# EAGLE board pcb (EAGLE 9.7.0)
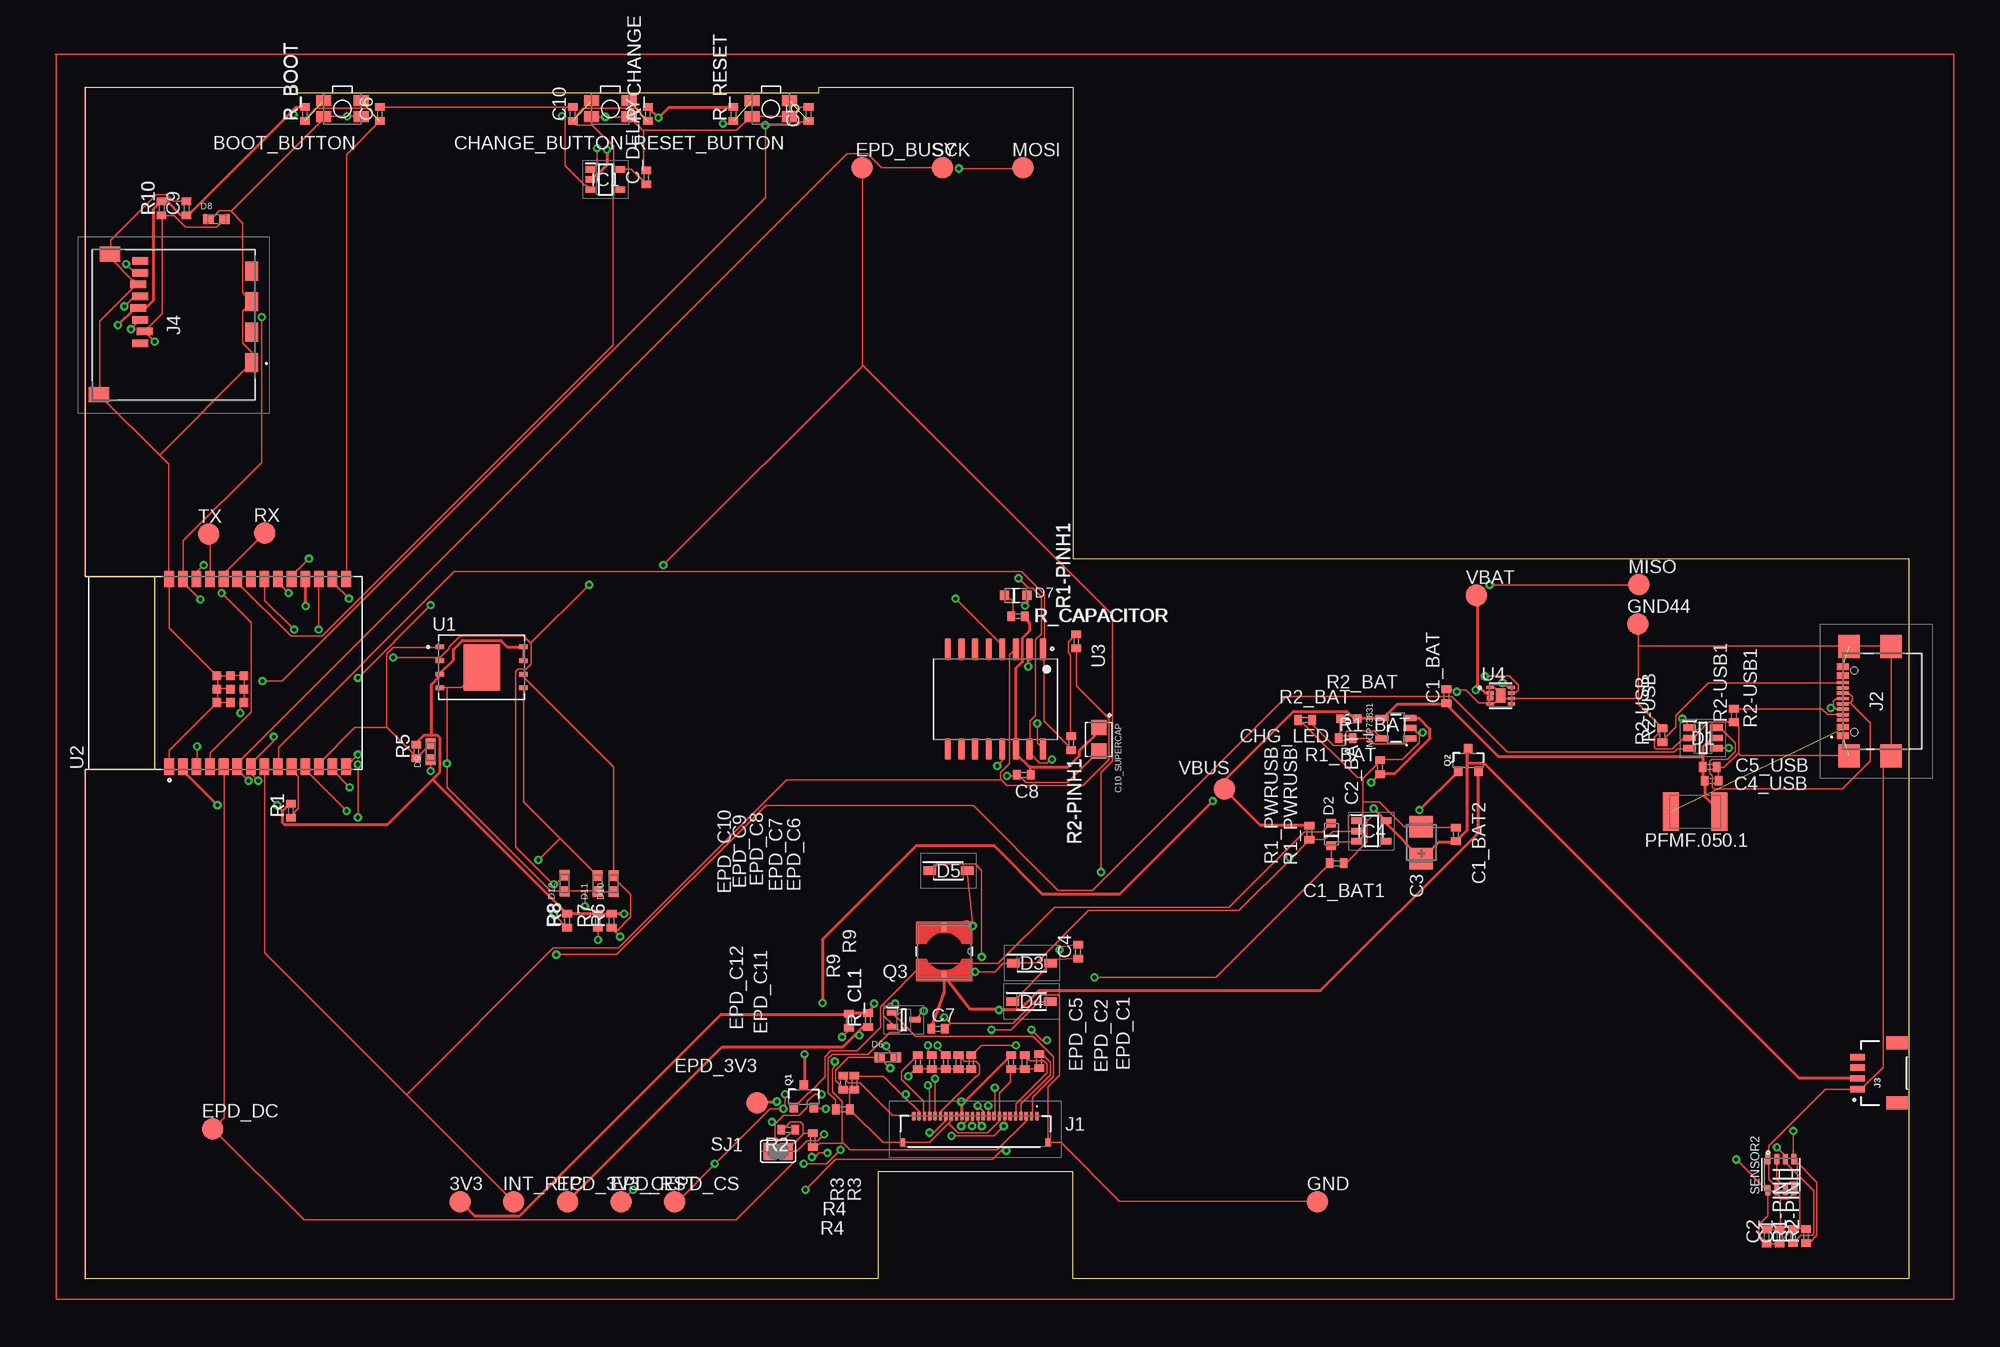
[diagram p0: board, top side]
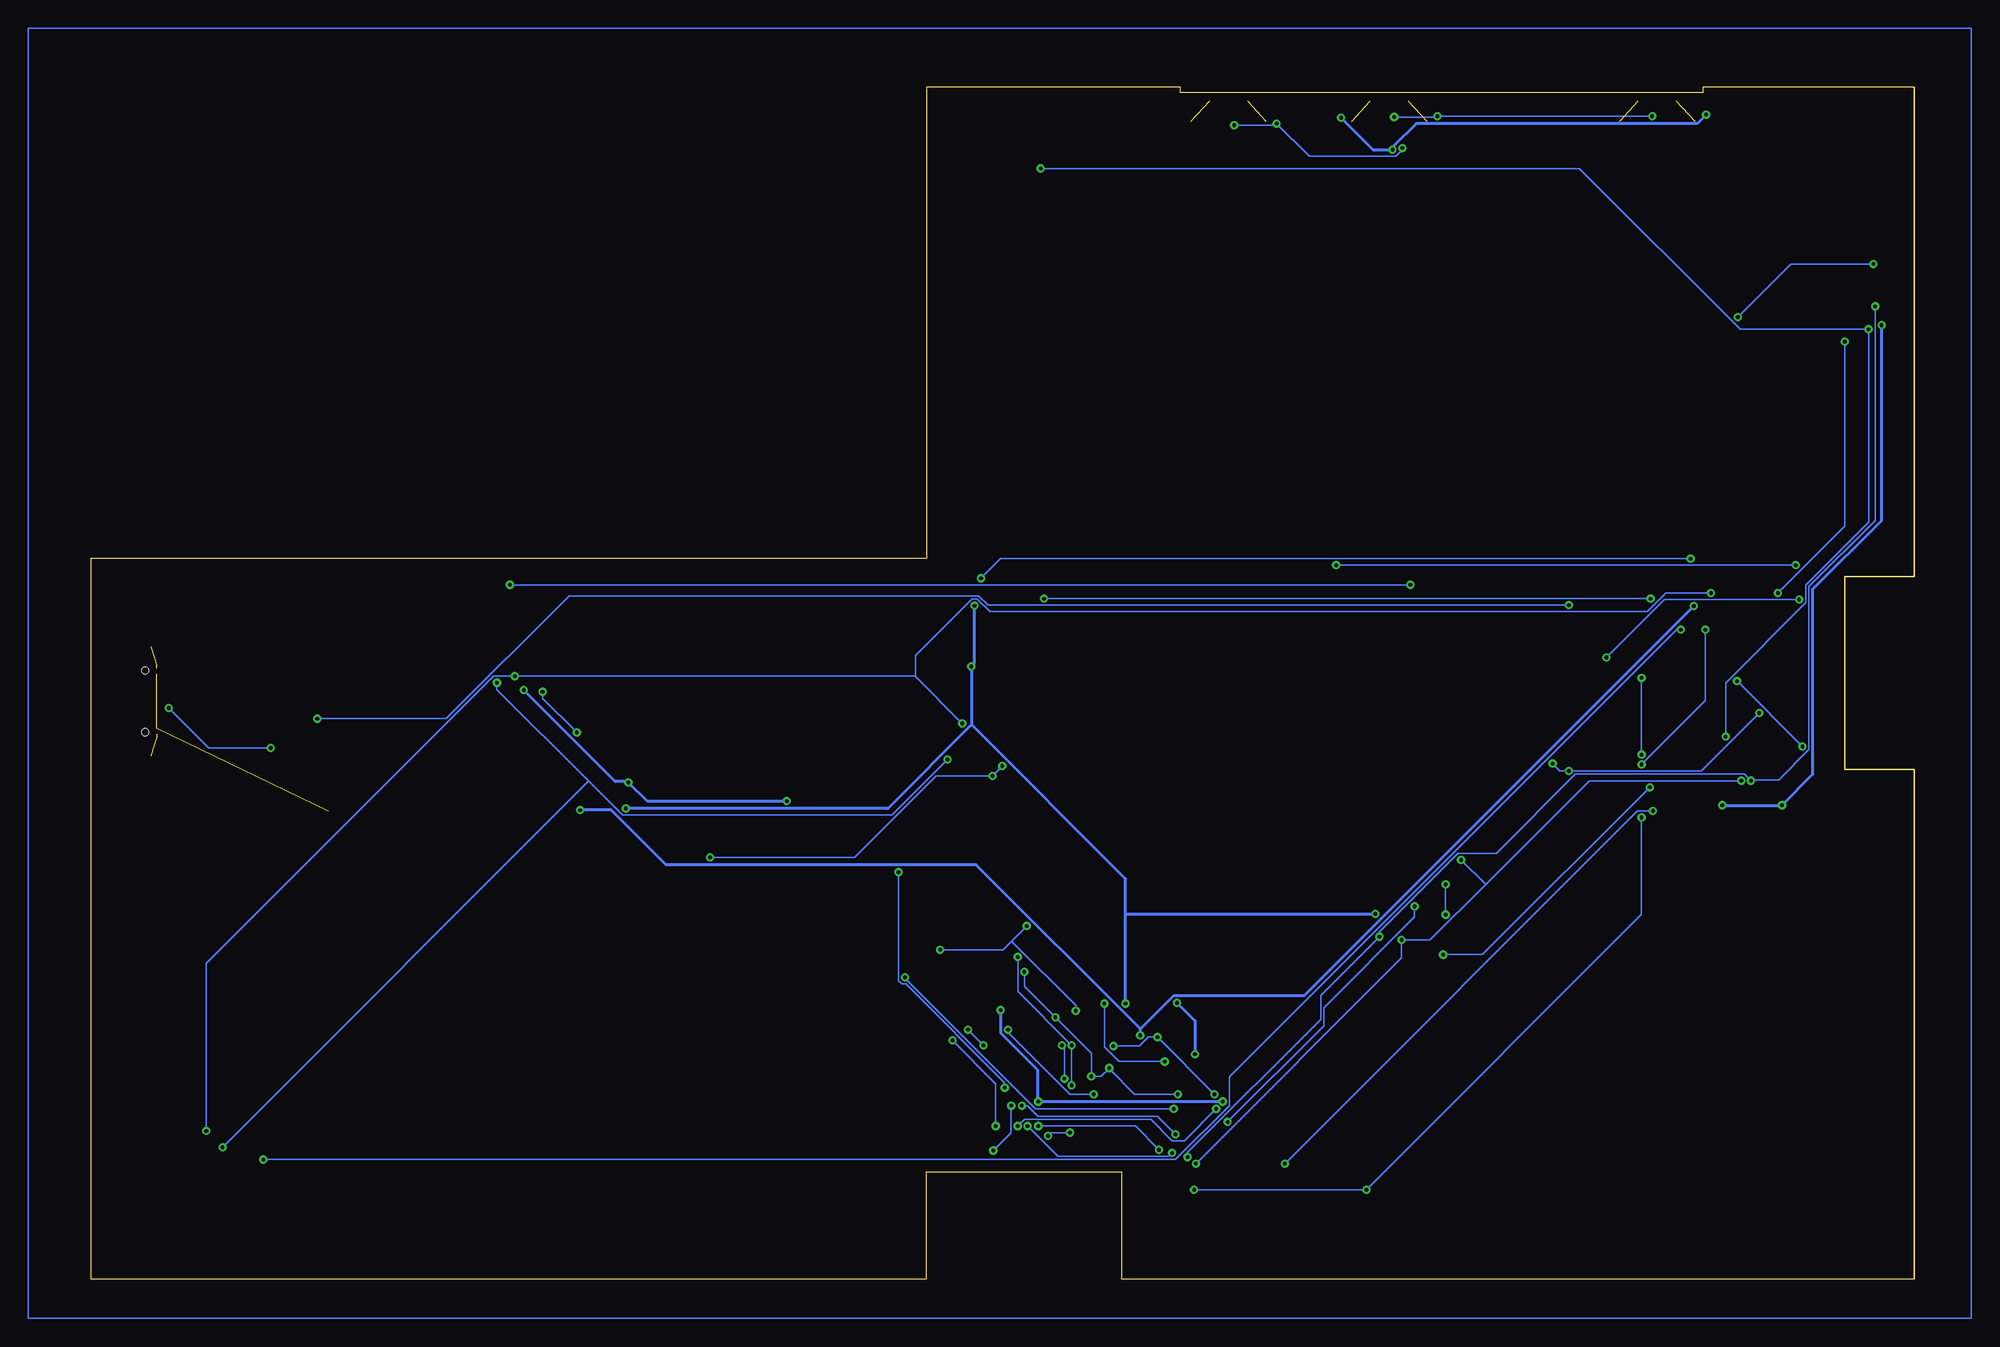
[diagram p1: board, bottom side, seen from below]

Size 170.2 x 111.2 mm. Coordinates in mm from the lower left corner, seen from the top.
Outline: 0,111.2 19.75,111.2 19.75,110.7 68.5,110.7 68.5,111.2 92.2,111.2 92.2,67.2 170.2,67.2 170.2,0 92.2,0 92.2,10 74,10 74,0 0,0 0,47.55 6.5,47.55 6.5,65.55 0,65.55 0,111.2
Copper layers (1*16): Top 0.035mm / dielectric 1.5mm / Bottom 0.035mm
Design rules "Fusion Electronics Design Rules *": minimum track width 6mil, minimum drill 0.35mm, track to track 6mil, track to pad 6mil, pad to pad 6mil, via to via 6mil, smd to smd 6mil, copper to edge 40mil, drill to drill 6mil, minimum pad ring 10mil, minimum via ring 8mil, stop-mask expansion 4mil, vias tented up to drill 0mil, thermal gap 10mil
Net classes: 1 power nets: width 0.3 mm; 2 natural nets: width 0.15 mm

## Footprints (pad centres in the part's own frame; a part is rotated, then mirrored left to right if it is on the bottom)
TP20R = smd 2 x 2: TP 0,0
MYBUTTON = smd 1.4 x 1.05: 1 1.75,0.75; 2 -1.75,0.75; 3 -1.75,-0.75; 4 1.75,-0.75
ESP32_WROVER_EAGLE-LTSPICE_C0402 = smd 0.7 x 0.9: 1 -0.65,0; 2 0.65,0
RCL_CT3528 = smd 2 x 2.2: + -1.5,0; - 1.5,0
CAPCP3225X100N = smd 1.4 x 1.4: 1 -1.1,0; 2 1.1,0
ADAFRUIT_CHIP-LED0603 = smd 0.8 x 0.8: A 0,-0.75; C 0,0.75
SOT95P280X145-6N = smd 1.2 x 0.6: 1 -1.25,0.95; 2 -1.25,0; 3 -1.25,-0.95; 4 1.25,-0.95; 5 1.25,0; 6 1.25,0.95
ESP32_WROVER_AVX---SD0805S020S1R0_AVX_SD0805S020S1R0_0 = smd 0.8 x 0.9: 1 -1.05,0; 2 1.05,0
SOD3716X135N = smd 1.15 x 0.8: 1 -1.75,0; 2 1.75,0
DIOC1608X36N = smd 0.97 x 0.94: 1 -0.75,0; 2 0.75,0
SOT95P280X125-5N = smd 0.9 x 0.6: 1 -1.4,0.95; 2 -1.4,0; 3 -1.4,-0.95; 4 1.4,-0.95; 5 1.4,0.95
SOT95P280X120-5N = smd 0.9 x 0.6: 1 -1.4,0.95; 2 -1.4,0; 3 -1.4,-0.95; 4 1.4,-0.95; 5 1.4,0.95
FH34SRJ24S05SH99 = smd 0.3 x 0.8: 1 5.75,1.45; 2 5.25,1.45; 3 4.75,1.45; 4 4.25,1.45; 5 3.75,1.45; 6 3.25,1.45; 7 2.75,1.45; 8 2.25,1.45; 9 1.75,1.45; 10 1.25,1.45; 11 0.75,1.45; 12 0.25,1.45; 13 -0.25,1.45; 14 -0.75,1.45; 15 -1.25,1.45; 16 -1.75,1.45; 17 -2.25,1.45; 18 -2.75,1.45; 19 -3.25,1.45; 20 -3.75,1.45; 21 -4.25,1.45; 22 -4.75,1.45; 23 -5.25,1.45; 24 -5.75,1.45 | smd 0.4 x 0.8: MP1 6.75,-1.05; MP2 -6.75,-1.05
SAMACSYS_PARTS_USB4110GFA = smd 0.3 x 1.15: A1 -3.35,3.678; A4 -2.55,3.678; A5 -1.25,3.678; A6 -0.25,3.678; A7 0.25,3.678; A8 1.25,3.678; A9 2.55,3.678; A12 3.35,3.678; B1 3.05,3.678; B4 2.25,3.678; B5 1.75,3.678; B6 0.75,3.678; B7 -0.75,3.678; B8 -1.75,3.678; B9 -2.25,3.678; B12 -3.05,3.678 | smd 2.18 x 2: MP1 -5.11,-0.827; MP2 5.11,-0.827; MP3 -5.11,3.103; MP4 5.11,3.103 | hole 0.65: -2.89,2.603; 2.89,2.603
JST04_1MM_RA = smd 0.6 x 1.35: 1 -1.5,0; 2 -0.5,0; 3 0.5,0; 4 1.5,0 | smd 1.2 x 2: NC1 2.8,-3.675; NC2 -2.8,-3.675
112ATAARR03ATTEND = smd 1.8 x 1.2: G1 10.6,10.4; G2 4.9,10.4; S1 7.75,10.4; S2 2.05,10.4 | smd 1.4 x 1.9: G3 13.6,-3.85; G4 0.45,-2.85 | smd 0.7 x 1.5: P1 8.8,0; P2 7.7,0.4; P3 6.6,0; P4 5.5,-0.2; P5 4.4,0; P6 3.3,-0.2; P7 2.2,0; P8 1.1,0
IND_4828-WE-TPC_WRE = smd 0.813 x 0.406: 1 -2.286,0; 2 2.286,0
ESP32_WROVER_SPARKFUN-IC-POWER_SOT23-5 = smd 0.55 x 1.2: 1 -0.95,-1.3; 2 0,-1.3; 3 0.95,-1.3; 4 0.95,1.3; 5 -0.95,1.3
ESP32C6_VARISTOR_CT/CN1812 = smd 1.5 x 3.6: 1 -2.25,0; 2 2.25,0
ESP32_WROVER_SPARKFUN-DISCRETESEMI_SOT23-3 = smd 0.8 x 0.9: 1 -0.95,-1; 2 0.95,-1; 3 0,1.1
SOT65P210X110-3N = smd 1.05 x 0.5: 1 -1.05,0.65; 2 -1.05,-0.65; 3 1.05,0
ESP32_WROVER_EAGLE-LTSPICE_R0402 = smd 0.7 x 0.9: 1 -0.65,0; 2 0.65,0
ESP32_WROVER_BME680_PSON80P300X300X100-8N = smd 1.016 x 0.5: 1 1.458,1.2; 2 1.458,0.4; 3 1.458,-0.4; 4 1.458,-1.2; 5 -1.458,-1.22; 6 -1.458,-0.4; 7 -1.458,0.4; 8 -1.458,1.2
SJ = smd 1.168 x 1.6: 1 -0.762,0; 2 0.762,0
SON127P600X800X80-9N = smd 0.94 x 0.44: 1 -3.895,1.905; 2 -3.895,0.635; 3 -3.895,-0.635; 4 -3.895,-1.905; 5 3.895,-1.905; 6 3.895,-0.635; 7 3.895,0.635; 8 3.895,1.905 | smd 3.4 x 4.3: 9 0,0
XCVR_ESP32-C6-WROOM-1-N8 = smd 1.5 x 0.9: 1 -8.75,5.26; 2 -8.75,3.99; 3 -8.75,2.72; 4 -8.75,1.45; 5 -8.75,0.18; 6 -8.75,-1.09; 7 -8.75,-2.36; 8 -8.75,-3.63; 9 -8.75,-4.9; 10 -8.75,-6.17; 11 -8.75,-7.44; 12 -8.75,-8.71; 13 -8.75,-9.98; 14 -8.75,-11.25; 15 8.75,-11.25; 16 8.75,-9.98; 17 8.75,-8.71; 18 8.75,-7.44; 19 8.75,-6.17; 20 8.75,-4.9; 21 8.75,-3.63; 22 8.75,-2.36; 23 8.75,-1.09; 24 8.75,0.18; 25 8.75,1.45; 26 8.75,2.72; 27 8.75,3.99; 28 8.75,5.26 | smd 0.8 x 0.8: 29_1 -2.755,0.79; 29_2 -1.505,0.79; 29_3 -0.255,0.79; 29_4 -2.755,-0.46; 29_5 -1.505,-0.46; 29_6 -0.255,-0.46; 29_7 -2.755,-1.71; 29_8 -1.505,-1.71; 29_9 -0.255,-1.71
SOIC127P1032X265-16N = smd 2.05 x 0.59: 1 -4.655,4.445; 2 -4.655,3.175; 3 -4.655,1.905; 4 -4.655,0.635; 5 -4.655,-0.635; 6 -4.655,-1.905; 7 -4.655,-3.175; 8 -4.655,-4.445; 9 4.655,-4.445; 10 4.655,-3.175; 11 4.655,-1.905; 12 4.655,-0.635; 13 4.655,0.635; 14 4.655,1.905; 15 4.655,3.175; 16 4.655,4.445
SON50P200X200X80-9N = smd 0.76 x 0.27: 1 -0.985,0.75; 4 -0.985,-0.75; 5 0.985,-0.75; 6 0.985,-0.25; 7 0.985,0.25; 8 0.985,0.75 | smd 0.762 x 0.406: 2 -0.985,0.25 | smd 0.711 x 0.406: 3 -0.985,-0.25 | smd 0.9 x 1.3: 9 0,0

## Placement (x,y rotation side)
3V3  TPTP20R  [TP20R]  35,7.2 0 top
BOOT_BUTTON  BUTTON_CUSYOMV1  [MYBUTTON]  24,109.2 180 top
C1  100nF  [ESP32_WROVER_EAGLE-LTSPICE_C0402]  158.14,3.93 90 top
C1_BAT  4.7uF  [ESP32_WROVER_EAGLE-LTSPICE_C0402]  127.03,54.35 90 top
C1_BAT1  4.7uF  [ESP32_WROVER_EAGLE-LTSPICE_C0402]  116.78,38.77 0 top
C1_BAT2  4.7uF  [ESP32_WROVER_EAGLE-LTSPICE_C0402]  127.92,41.47 90 top
C2  100nF  [ESP32_WROVER_EAGLE-LTSPICE_C0402]  156.92,3.93 90 top
C2_BAT  4.7uF  [ESP32_WROVER_EAGLE-LTSPICE_C0402]  120.84,47.75 90 top
C3  100uF  [RCL_CT3528]  124.69,40.7 90 top
C4  4.7uF/25V  [ESP32_WROVER_EAGLE-LTSPICE_C0402]  92.66,30.54 90 top
C4_USB  100nF  [ESP32_WROVER_EAGLE-LTSPICE_C0402]  151.8,46.47 0 top
C5  1uF  [ESP32_WROVER_EAGLE-LTSPICE_C0402]  67.5,108.7 90 top
C5_USB  4.7uF  [ESP32_WROVER_EAGLE-LTSPICE_C0402]  151.61,47.77 0 top
C6  100nF  [ESP32_WROVER_EAGLE-LTSPICE_C0402]  27.5,108.7 90 top
C7  10uF  [ESP32_WROVER_EAGLE-LTSPICE_C0402]  79.59,23.33 0 top
C8  100nF  [ESP32_WROVER_EAGLE-LTSPICE_C0402]  87.58,47.03 0 top
C9  100nF  [ESP32_WROVER_EAGLE-LTSPICE_C0402]  9.46,99.9 90 top
C10  100nF  [ESP32_WROVER_EAGLE-LTSPICE_C0402]  45.5,108.7 90 top
C10_SUPERCAP  CPH3225A  [CAPCP3225X100N]  94.59,50.34 270 top
C_DELAY  100nF  [ESP32_WROVER_EAGLE-LTSPICE_C0402]  52.37,102.79 90 top
CHANGE_BUTTON  BUTTON_CUSYOMV1  [MYBUTTON]  49,109.2 180 top
CHG_LED  [ADAFRUIT_CHIP-LED0603]  117.94,52.25 90 top
D1  USBLC6-2SC6Y  [SOT95P280X145-6N]  150.98,50.47 0 top
D2  ESP32_WROVER_AVX---SD0805S020S1R0_AVX_SD0805S020S1R0_0_0AVX_SD0805S020S1R0_0_0  [ESP32_WROVER_AVX---SD0805S020S1R0_AVX_SD0805S020S1R0_0]  116.29,41.48 90 top
D3  MBR0530  [SOD3716X135N]  88.36,29.47 0 top
D4  MBR0530  [SOD3716X135N]  88.32,25.88 0 top
D5  MBR0530  [SOD3716X135N]  80.56,38.08 0 top
D6  PGB1010603MR  [DIOC1608X36N]  74.88,20.67 0 top
D7  ESP32_WROVER_AVX---SD0805S020S1R0_AVX_SD0805S020S1R0_0_0AVX_SD0805S020S1R0_0_0  [ESP32_WROVER_AVX---SD0805S020S1R0_AVX_SD0805S020S1R0_0]  86.84,63.78 0 top
D8  PGB1010603MR  [DIOC1608X36N]  12.26,98.9 0 top
D9  PGB1010603MR  [DIOC1608X36N]  32.24,49.2 90 top
D10  PGB1010603MR  [DIOC1608X36N]  49.32,36.87 90 top
D11  PGB1010603MR  [DIOC1608X36N]  47.8,36.87 90 top
D12  PGB1010603MR  [DIOC1608X36N]  44.74,36.9 90 top
EPD_3V3  TPTP20R  [TP20R]  62.68,16.41 0 top
EPD_3V3_C  TPTP20R  [TP20R]  45,7.2 0 top
EPD_BUSY  TPTP20R  [TP20R]  72.5,103.7 0 top
EPD_C1  1uF/50V  [ESP32_WROVER_EAGLE-LTSPICE_C0402]  89.02,20.3 90 top
EPD_C2  1uF/50V  [ESP32_WROVER_EAGLE-LTSPICE_C0402]  87.67,20.2 90 top
EPD_C5  0.1uF/50V  [ESP32_WROVER_EAGLE-LTSPICE_C0402]  86.41,20.2 90 top
EPD_C6  1uF/50V  [ESP32_WROVER_EAGLE-LTSPICE_C0402]  82.69,20.2 90 top
EPD_C7  1uF/50V  [ESP32_WROVER_EAGLE-LTSPICE_C0402]  81.5,20.2 90 top
EPD_C8  1uF/50V  [ESP32_WROVER_EAGLE-LTSPICE_C0402]  80.31,20.2 90 top
EPD_C9  1uF/50V  [ESP32_WROVER_EAGLE-LTSPICE_C0402]  79.02,20.2 90 top
EPD_C10  1uF/50V  [ESP32_WROVER_EAGLE-LTSPICE_C0402]  77.71,20.2 90 top
EPD_C11  1uF/50V  [ESP32_WROVER_EAGLE-LTSPICE_C0402]  71.79,18.29 90 top
EPD_C12  1uF/50V  [ESP32_WROVER_EAGLE-LTSPICE_C0402]  70.74,18.29 90 top
EPD_CS  TPTP20R  [TP20R]  55,7.2 0 top
EPD_DC  TPTP20R  [TP20R]  11.89,13.99 0 top
EPD_RST  TPTP20R  [TP20R]  50,7.2 0 top
GND  TPTP20R  [TP20R]  115,7.2 0 top
GND44  TPTP20R  [TP20R]  144.89,61.09 0 top
IC1  BD5229G-TR  [SOT95P280X125-5N]  48.55,102.6 0 top
IC4  XC6220A331MR-G  [SOT95P280X120-5N]  120.03,41.79 0 top
INT_RTC  TPTP20R  [TP20R]  40,7.2 0 top
J1  FH34SRJ-24S-0.5SH_99_  [FH34SRJ24S05SH99]  83.07,13.74 0 top
J2  SAMACSYS_PARTS_USB4110-GF-A  [SAMACSYS_PARTS_USB4110GFA]  167.7,53.9 90 top
J3  QWIIC_RIGHT_ANGLE  [JST04_1MM_RA]  165.4,19.2 90 top
J4  112A-TAAR-R03_ATTEND  [112ATAARR03ATTEND]  5.15,96.1 270 top
L1  68uH  [IND_4828-WE-TPC_WRE]  80.17,30.55 270 top
MCP73831  ESP32_WROVER_SPARKFUN-IC-POWER_MCP73831  [ESP32_WROVER_SPARKFUN-IC-POWER_SOT23-5]  122.32,51.39 90 top
MISO  TPTP20R  [TP20R]  145.01,64.79 0 top
MOSI  TPTP20R  [TP20R]  87.5,103.7 0 top
PFMF.050.1  ESP32C6_VARISTORCN1812  [ESP32C6_VARISTOR_CT/CN1812]  150.24,43.6 0 top
Q1  20V/4.2A/52mΩ/1.4W  [ESP32_WROVER_SPARKFUN-DISCRETESEMI_SOT23-3]  67.06,16.96 0 top
Q2  20V/4.2A/52mΩ/1.4W  [ESP32_WROVER_SPARKFUN-DISCRETESEMI_SOT23-3]  129.08,48.36 0 top
Q3  SI1308EDL-T1-GE3  [SOT65P210X110-3N]  76.39,24.18 0 top
R1  10K  [ESP32_WROVER_EAGLE-LTSPICE_R0402]  19.2,43.7 90 top
R1-PINH  10K  [ESP32_WROVER_EAGLE-LTSPICE_R0402]  159.38,3.97 90 top
R1-PINH1  10K  [ESP32_WROVER_EAGLE-LTSPICE_R0402]  92.49,59.49 90 top
R1_BAT  200  [ESP32_WROVER_EAGLE-LTSPICE_R0402]  117.65,50.45 0 top
R1_PWRUSB  100k  [ESP32_WROVER_EAGLE-LTSPICE_R0402]  114.25,41.64 90 top
R2  2.2  [ESP32_WROVER_EAGLE-LTSPICE_R0402]  65.63,13.91 180 top
R2-PINH  10K  [ESP32_WROVER_EAGLE-LTSPICE_R0402]  160.59,3.97 90 top
R2-PINH1  10K  [ESP32_WROVER_EAGLE-LTSPICE_R0402]  92.03,49.99 90 top
R2-USB  5k1  [ESP32_WROVER_EAGLE-LTSPICE_R0402]  147.18,50.73 90 top
R2-USB1  5k1  [ESP32_WROVER_EAGLE-LTSPICE_R0402]  153.86,52.57 90 top
R2_BAT  2K  [ESP32_WROVER_EAGLE-LTSPICE_R0402]  113.86,52.15 0 top
R3  0.47  [ESP32_WROVER_EAGLE-LTSPICE_R0402]  67.91,12.93 270 top
R4  10K  [ESP32_WROVER_EAGLE-LTSPICE_R0402]  70.69,15.81 180 top
R5  10K  [ESP32_WROVER_EAGLE-LTSPICE_R0402]  30.91,49.21 90 top
R6  10K  [ESP32_WROVER_EAGLE-LTSPICE_R0402]  49.13,33.41 90 top
R7  10K  [ESP32_WROVER_EAGLE-LTSPICE_R0402]  47.85,33.41 90 top
R8  10K  [ESP32_WROVER_EAGLE-LTSPICE_R0402]  44.97,33.41 90 top
R9  10K  [ESP32_WROVER_EAGLE-LTSPICE_R0402]  71.29,24.11 90 top
R10  10K  [ESP32_WROVER_EAGLE-LTSPICE_R0402]  7.13,99.9 90 top
R_BOOT  10K  [ESP32_WROVER_EAGLE-LTSPICE_R0402]  20.5,108.7 90 top
R_CAPACITOR  15  [ESP32_WROVER_EAGLE-LTSPICE_R0402]  87.05,61.84 0 top
R_CHANGE  10K  [ESP32_WROVER_EAGLE-LTSPICE_R0402]  52.5,108.7 90 top
R_CL1  10K  [ESP32_WROVER_EAGLE-LTSPICE_R0402]  73.06,24.13 90 top
R_RESET  10K  [ESP32_WROVER_EAGLE-LTSPICE_R0402]  60.5,108.7 90 top
RESET_BUTTON  BUTTON_CUSYOMV1  [MYBUTTON]  64,109.2 180 top
RX  TPTP20R  [TP20R]  16.73,69.59 0 top
SCK  TPTP20R  [TP20R]  80,103.7 0 top
SENSOR2  ESP32_WROVER_BME680_BME680  [ESP32_WROVER_BME680_PSON80P300X300X100-8N]  158.25,9.72 90 top
SJ1  [SJ]  64.66,11.89 0 top
TX  TPTP20R  [TP20R]  11.51,69.49 0 top
U1  W25Q512JVEIQ  [SON127P600X800X80-9N]  37,57.06 0 top
U2  ESP32-C6-WROOM-1-N8  [XCVR_ESP32-C6-WROOM-1-N8]  13.1,56.54 90 top
U3  DS3231SN#  [SOIC127P1032X265-16N]  84.95,54.1 270 top
U4  MAX17048G+T10  [SON50P200X200X80-9N]  132.11,54.42 0 top
VBAT  TPTP20R  [TP20R]  129.85,63.79 0 top
VBUS  TPTP20R  [TP20R]  106.33,45.71 0 top

## Library data of the parts
3V3 BOOT_BUTTON CHANGE_BUTTON CHG_LED EPD_3V3 EPD_3V3_C EPD_BUSY EPD_CS EPD_DC EPD_RST GND GND44 INT_RTC MISO MOSI PFMF.050.1 RESET_BUTTON RX SCK SJ1 TX VBAT VBUS = DeskAssistant v19 v1
C1 C1_BAT C1_BAT1 C1_BAT2 C2 C2_BAT C4 C4_USB C5 C5_USB C6-C10 C_DELAY EPD_C1 EPD_C2 EPD_C5-EPD_C12 = DeskAssistant v19 v1; SPICEMODEL: NONE; SPICEPREFIX: C
C3 = DeskAssistant v19 v1; SPICEPREFIX: C
C10_SUPERCAP = DeskAssistant v19 v1; AVAILABILITY: Not in stock; CHECK_PRICES: https://www.snapeda.com/parts/CPH3225A/Seiko+Instruments/view-part/?ref=eda; DESCRIPTION: 11 mF (EDLC) Supercapacitor 3.3 V 1210 (3225 Metric) - -; MF: Seiko Instruments; MP: CPH3225A; PACKAGE: 1210 Seiko; PRICE: None; PURCHASE-URL: https://www.snapeda.com/api/url_track_click_mouser/?unipart_id=562593&manufacturer=Seiko Instruments&part_name=CPH3225A&search_term=None; SNAPEDA_LINK: https://www.snapeda.com/parts/CPH3225A/Seiko+Instruments/view-part/?ref=snap
D1 = DeskAssistant v19 v1; AVAILABILITY: In Stock; CHECK_PRICES: https://www.snapeda.com/parts/USBLC6-2SC6Y/STMicroelectronics/view-part/?ref=eda; DESCRIPTION: 17V Clamp 5A (8/20µs) Ipp Tvs Diode Surface Mount SOT-23-6; MF: STMicroelectronics; MP: USBLC6-2SC6Y; PACKAGE: SOT-23-6 STMicroelectronics; PRICE: None; SNAPEDA_LINK: https://www.snapeda.com/parts/USBLC6-2SC6Y/STMicroelectronics/view-part/?ref=snap
D2 D7 = DeskAssistant v19 v1; CENTROID_NOT_SPECIFIED: No; DATASHEET: http://datasheets.avx.com/schottky.pdf; DIGIKEY_DESCRIPTION: DIODE SCHOTTKY 20V 1A 0805; DIGIKEY_PART_NUMBER: 478-7800-1-ND; LEAD_FREE: yes; MF: AVX; MOUSER_PART_NUMBER: 581-SD0805S020S1R0; PACKAGE: 0805 (2012 metric); PREFIX: D; ROHS: yes; TEMPERATURE_RANGE_HIGH: +125°C; TEMPERATURE_RANGE_LOW: -55°C
D3-D5 = DeskAssistant v19 v1; AVAILABILITY: In Stock; CHECK_PRICES: https://www.snapeda.com/parts/MBR0530/Onsemi/view-part/?ref=eda; DESCRIPTION: Diode Schottky 30 V 500mA Surface Mount SOD-123; MF: ON Semiconductor; MP: MBR0530; PACKAGE: SOD-123-2 ON Semiconductor; PRICE: None; PURCHASE-URL: https://www.snapeda.com/api/url_track_click_mouser/?unipart_id=179458&manufacturer=ON Semiconductor&part_name=MBR0530&search_term=None; SNAPEDA_LINK: https://www.snapeda.com/parts/MBR0530/Onsemi/view-part/?ref=snap
D6 D8-D12 = DeskAssistant v19 v1; AVAILABILITY: In Stock; CHECK_PRICES: https://www.snapeda.com/parts/PGB1010603MR/Littelfuse/view-part/?ref=eda; DESCRIPTION: 150V (Typ) Clamp - Ipp Tvs Diode Surface Mount 0603 (1608 Metric); MF: Littelfuse Inc.; MP: PGB1010603MR; PACKAGE: 0603 Littelfuse Inc.; PRICE: None; PURCHASE-URL: https://www.snapeda.com/api/url_track_click_mouser/?unipart_id=5659453&manufacturer=Littelfuse Inc.&part_name=PGB1010603MR&search_term=None; SNAPEDA_LINK: https://www.snapeda.com/parts/PGB1010603MR/Littelfuse/view-part/?ref=snap
IC1 = DeskAssistant v19 v1; DESCRIPTION: Voltage Detector with Adjustable Delay Time: CMOS processes are utilized to develop high precision, low current consumption CMOS reset ICs that allow arbitrary setting of the delay time. The extensive lineup includes both Nch Open Drain and CMOS output types in a wide range of detection voltages (from 2.3V to 6.0V, in 0.1V steps), enabling selection of the ideal solution based on customer requirements. In addition, the entire series is of course both lead-free and RoHS-compliant.; HEIGHT: 1.25mm; MANUFACTURER_NAME: ROHM Semiconductor; MANUFACTURER_PART_NUMBER: BD5229G-TR; MOUSER_PART_NUMBER: 755-BD5229G-TR; MOUSER_PRICE-STOCK: https://www.mouser.co.uk/ProductDetail/ROHM-Semiconductor/BD5229G-TR?qs=4kLU8WoGk0vvnhrrYwdszw%3D%3D
IC4 = DeskAssistant v19 v1; DESCRIPTION: LDO Voltage Regulators; HEIGHT: 1.2mm; MANUFACTURER_NAME: Torex; MANUFACTURER_PART_NUMBER: XC6220A331MR-G; MOUSER_PART_NUMBER: 865-XC6220A331MR-G; MOUSER_PRICE-STOCK: https://www.mouser.co.uk/ProductDetail/Torex-Semiconductor/XC6220A331MR-G?qs=AsjdqWjXhJ8ZSWznL1J0gg%3D%3D
J1 = DeskAssistant v19 v1; DESCRIPTION: 24 Position FFC, FPC Connector Contacts, Top and Bottom 0.020" (0.50mm) Surface Mount, Right Angle; HEIGHT: 1.1mm; MANUFACTURER_NAME: Hirose; MANUFACTURER_PART_NUMBER: FH34SRJ-24S-0.5SH(99); MOUSER_PART_NUMBER: 798-FH34SRJ24S05SH99; MOUSER_PRICE-STOCK: https://www.mouser.co.uk/ProductDetail/Hirose-Connector/FH34SRJ-24S-0.5SH99?qs=vcbW%252B4%252BSTIpKBl5ap9J8Fw%3D%3D
J2 = DeskAssistant v19 v1; DESCRIPTION: CONN USB 2.0 TYPE-C R/A SMT; HEIGHT: 3.26mm; MANUFACTURER_NAME: GCT (GLOBAL CONNECTOR TECHNOLOGY); MANUFACTURER_PART_NUMBER: USB4110-GF-A; MOUSER_PART_NUMBER: 640-USB4110-GF-A; MOUSER_PRICE-STOCK: https://www.mouser.co.uk/ProductDetail/GCT/USB4110-GF-A?qs=KUoIvG%2F9IlYiZvIXQjyJeA%3D%3D
J3 = DeskAssistant v19 v1; PROD_ID: CONN-13694
J4 = DeskAssistant v19 v1; DESCRIPTION: Micro SD Card Socket, Push-Push Type, Top Mount, SMT, H=1.83mm, 10u; HEIGHT: 1.9mm; MANUFACTURER_NAME: ATTEND; MANUFACTURER_PART_NUMBER: 112A-TAAR-R03 ATTEND
L1 = DeskAssistant v19 v1; COPYRIGHT: Copyright (C) 2024 Ultra Librarian. All rights reserved.; MANUFACTURER_PART_NUMBER: 744043680; MFR_NAME: Wurth Electronics
MCP73831 = DeskAssistant v19 v1; PROD_ID: IC-09995
Q1 Q2 = DeskAssistant v19 v1; PROD_ID: TRAN-14388
Q3 = DeskAssistant v19 v1; AVAILABILITY: In Stock; CHECK_PRICES: https://www.snapeda.com/parts/SI1308EDL-T1-GE3/Vishay+Siliconix/view-part/?ref=eda; DESCRIPTION: Si1308EDL-T1-GE3 N-channel MOSFET Transistor, 1.5 A, 30 V, 3-Pin SC-70 | Siliconix / Vishay SI1308EDL-T1-GE3; MF: Vishay Siliconix; MP: SI1308EDL-T1-GE3; PACKAGE: SOT-323 Vishay Semiconductor; PRICE: None; PURCHASE-URL: https://www.snapeda.com/api/url_track_click_mouser/?unipart_id=274603&manufacturer=Vishay Siliconix&part_name=SI1308EDL-T1-GE3&search_term=None; SNAPEDA_LINK: https://www.snapeda.com/parts/SI1308EDL-T1-GE3/Vishay+Siliconix/view-part/?ref=snap
R1 R1-PINH R1-PINH1 R1_BAT R1_PWRUSB R2 R2-PINH R2-PINH1 R2-USB R2-USB1 R2_BAT R3-R10 R_BOOT R_CAPACITOR R_CHANGE R_CL1 R_RESET = DeskAssistant v19 v1; SPICEMODEL: NONE; SPICEPREFIX: R
SENSOR2 = DeskAssistant v19 v1; AVAILABILITY: Unavailable; DESCRIPTION: Integrated Environmental Unit; MF: Bosch Sensortec; MP: BME680; PACKAGE: LGA-8 Bosch Tools; PRICE: None
U1 = DeskAssistant v19 v1; AVAILABILITY: In Stock; CHECK_PRICES: https://www.snapeda.com/parts/W25Q512JVEIQ/Winbond+Electronics/view-part/?ref=eda; DESCRIPTION: FLASH - NOR Memory IC 512Mb (64M x 8) SPI - Quad I/O 133 MHz 8-WSON (8x6); MF: Winbond Electronics; MP: W25Q512JVEIQ; PACKAGE: Package; PRICE: None; SNAPEDA_LINK: https://www.snapeda.com/parts/W25Q512JVEIQ/Winbond+Electronics/view-part/?ref=snap
U2 = DeskAssistant v19 v1; AVAILABILITY: In Stock; CHECK_PRICES: https://www.snapeda.com/parts/ESP32-C6-WROOM-1-N8/Espressif+Systems/view-part/?ref=eda; DESCRIPTION: Multiprotocol Modules ESP32-C6 module, Wi-Fi 6 in 2.4 GHz band, Bluetooth 5, Zigbee 3.0 and Thread. ESP34-WROOM Compatible - ENGINEERING SAMPLE; MF: Espressif Systems; MP: ESP32-C6-WROOM-1-N8; PACKAGE: None; PRICE: None; SNAPEDA_LINK: https://www.snapeda.com/parts/ESP32-C6-WROOM-1-N8/Espressif+Systems/view-part/?ref=snap
U3 = DeskAssistant v19 v1; AVAILABILITY: In Stock; CHECK_PRICES: https://www.snapeda.com/parts/DS3231SN%23/Analog+Devices/view-part/?ref=eda; DESCRIPTION: Extremely Accurate I²C-Integrated RTC/TCXO/Crystal; MF: Analog Devices; MP: DS3231SN#; PACKAGE: SOIC-16 Maxim; PRICE: None; PURCHASE-URL: https://www.snapeda.com/api/url_track_click_mouser/?unipart_id=99048&manufacturer=Analog Devices&part_name=DS3231SN#&search_term=None; SNAPEDA_LINK: https://www.snapeda.com/parts/DS3231SN%23/Analog+Devices/view-part/?ref=snap
U4 = DeskAssistant v19 v1; AVAILABILITY: In Stock; CHECK_PRICES: https://www.snapeda.com/parts/MAX17048G+T10/Analog+Devices/view-part/?ref=eda; DESCRIPTION: 3µA 1-Cell/2-Cell Fuel Gauge with ModelGauge; MF: Analog Devices; MP: MAX17048G+T10; PACKAGE: TDFN-8 Maxim; PRICE: None; PURCHASE-URL: https://www.snapeda.com/api/url_track_click_mouser/?unipart_id=329239&manufacturer=Analog Devices&part_name=MAX17048G+T10&search_term=None; SNAPEDA_LINK: https://www.snapeda.com/parts/MAX17048G+T10/Analog+Devices/view-part/?ref=snap

## Nets
3V3 [power nets]: 3V3.TP C1_BAT2.1 C3.+ C9.1 D7.2 IC1.2 IC4.5 J3.2 J4.P4 Q2.3 R1.2 R5.2 R6.2 R7.2 R8.2 R9.2 R10.2 R_BOOT.2 R_CHANGE.2 R_CL1.2 R_RESET.2 U1.3 U1.7 U1.8 U2.2 U3.2
32KHZ [natural nets]: R2-PINH1.1 U2.9 U3.1
DN [natural nets]: D1.4 J2.A7 J2.B7
DP [natural nets]: D1.6 J2.A6 J2.B6
EPD_3V3 [power nets]: C7.1 EPD_3V3.TP EPD_C5.2 J1.15 J1.16 L1.2 Q2.2
EPD_3V3_C [power nets]: EPD_3V3_C.TP Q2.1 R_CL1.1 U2.18
EPD_BUSY [natural nets]: EPD_BUSY.TP J1.9 U2.26
EPD_CS [natural nets]: D6.2 EPD_CS.TP J1.12 R9.1 U2.11
EPD_DC [natural nets]: EPD_DC.TP J1.11 U2.5
EPD_RST [natural nets]: EPD_RST.TP J1.10 U2.21
FLASH_CS [natural nets]: D9.2 R5.1 U1.1 U2.12
GDR [natural nets]: J1.2 Q3.1 R4.2
GND [natural nets]: BOOT_BUTTON.1 BOOT_BUTTON.2 C1.2 C1_BAT1.2 C1_BAT2.2 C1_BAT.2 C2.2 C2_BAT.2 C3.- C4_USB.2 C5.2 C5_USB.2 C6.2 C7.2 C8.1 C9.2 C10.2 C10_SUPERCAP.2 C_DELAY.2 CHANGE_BUTTON.1 CHANGE_BUTTON.2 D1.2 D3.1 D6.1 D8.1 D9.1 D10.1 D11.1 D12.1 EPD_C1.1 EPD_C2.1 EPD_C5.1 EPD_C6.1 EPD_C7.1 EPD_C8.1 EPD_C9.1 EPD_C10.1 EPD_C11.1 EPD_C12.1 GND44.TP GND.TP IC1.3 IC4.2 J1.8 J1.17 J1.MP1 J1.MP2 J2.A1 J2.A12 J2.B1 J2.B12 J2.MP1 J2.MP2 J2.MP3 J2.MP4 J3.1 J4.G1 J4.G2 J4.G3 J4.G4 J4.P6 MCP73831.2 R1_PWRUSB.1 R2-USB1.1 R2-USB.2 R2.1 R2_BAT.1 R4.1 RESET_BUTTON.1 RESET_BUTTON.2 SENSOR2.1 SENSOR2.5 SENSOR2.7 SJ1.1 U1.4 U1.9 U2.1 U2.28 U2.29_1 U2.29_2 U2.29_3 U2.29_4 U2.29_5 U2.29_6 U2.29_7 U2.29_8 U2.29_9 U3.13 U4.1 U4.4 U4.6 U4.9
I2C_PW [natural nets]: C1.1 C2.1 R1-PINH.2 R2-PINH.2 SENSOR2.2 SENSOR2.6 SENSOR2.8 U2.17
INT_RTC [natural nets]: INT_RTC.TP R1-PINH1.1 U2.8 U3.3
IO/BOOT [natural nets]: BOOT_BUTTON.3 BOOT_BUTTON.4 C6.1 R_BOOT.1 U2.15
IO/CHANGE [natural nets]: C10.1 CHANGE_BUTTON.3 CHANGE_BUTTON.4 R_CHANGE.1 U2.23
MISO [natural nets]: D12.2 J4.P7 MISO.TP R8.1 U1.2 U2.27
MOSI [natural nets]: D11.2 J1.14 J4.P3 MOSI.TP R7.1 U1.5 U2.7
N$1 [natural nets]: J2.A5 R2-USB1.2
N$2 [natural nets]: J2.B5 R2-USB.1
N$3 [natural nets]: D2.2 Q1.1
N$4 [natural nets]: R1.1 U2.10
N$5 [natural nets]: C1_BAT1.1 D2.1 IC4.1 IC4.3 Q1.2
N$6 [natural nets]: C4.1 D3.2 D4.1
N$7 [natural nets]: J3.3
N$8 [natural nets]: J3.4
N$9 [natural nets]: MCP73831.1 R1_BAT.2
N$10 [natural nets]: MCP73831.5 R2_BAT.2
N$11 [natural nets]: C_DELAY.1 IC1.5
N$12 [natural nets]: EPD_C12.2 J1.24
N$13 [natural nets]: R1-PINH1.2 R2-PINH1.2
N$14 [natural nets]: CHG_LED.C R1_BAT.1
N$15 [natural nets]: EPD_C10.2 J1.22
N$16 [natural nets]: D7.1 R_CAPACITOR.1
N$17 [natural nets]: EPD_C8.2 J1.20
N$18 [natural nets]: EPD_C7.2 J1.19
N$19 [natural nets]: EPD_C6.2 J1.18
N$24 [natural nets]: EPD_C1.2 J1.4
N$26 [natural nets]: EPD_C2.2 J1.5
PREVGH [natural nets]: D5.1 EPD_C9.2 J1.21
PREVGL [natural nets]: D4.2 EPD_C11.2 J1.23
RESE [natural nets]: J1.3 Q3.2 R3.2
RESE' [natural nets]: R2.2 R3.1 SJ1.2
RESET [natural nets]: C5.1 IC1.1 R_RESET.1 RESET_BUTTON.3 RESET_BUTTON.4 U2.3
RTC_RST [natural nets]: U2.16 U3.4
RX [natural nets]: RX.TP U2.24
SCK [natural nets]: D10.2 J1.13 J4.P5 R6.1 SCK.TP U1.6 U2.6
SCL [natural nets]: R2-PINH.1 SENSOR2.4 U2.20 U3.16 U4.7
SDA [natural nets]: R1-PINH.1 SENSOR2.3 U2.19 U3.15 U4.8
SRC [natural nets]: C4.2 D5.2 L1.1 Q3.3
SS_SD [natural nets]: D8.2 J4.P2 R10.1 U2.4
TX [natural nets]: TX.TP U2.25
USB_D+ [natural nets]: D1.1 U2.14
USB_D- [natural nets]: D1.3 U2.13
VBAT [power nets]: C2_BAT.1 MCP73831.3 Q1.3 U4.2 U4.3 VBAT.TP
VBUS [power nets]: C1_BAT.1 C4_USB.1 C5_USB.1 CHG_LED.A D1.5 MCP73831.4 PFMF.050.1.2 R1_PWRUSB.2 VBUS.TP
VRTC [power nets]: C8.2 C10_SUPERCAP.1 R_CAPACITOR.2 U3.14
VUSB [power nets]: J2.A4 J2.A9 J2.B4 J2.B9 PFMF.050.1.1

## Tracks (layer width: path | path; a pad name or v marks a point on that pad's centre or on a via)
3V3  (via drill 0.35)
  Top 0.3: 129.01,48.16 129.01,41.91 128.02,40.92 C1_BAT2.1 127.86,40.77 126.34,40.77 124.82,39.24 C3.+ 124.66,39.24 121.46,42.44 121.46,42.67 IC4.5 121.31,42.82 v120.24,43.89 | 129.01,48.16 129.01,49.45 Q2.3 | 129.01,48.16 130.53,48.16 159.94,18.74 165.35,18.74 J3.2 | R_CHANGE.2 v53.49,108.36 54.48,109.35 60.43,109.35 R_RESET.2 | 19.2,108.89 9.6,99.29 C9.1 9.45,99.29 8.91,99.29 7.7,100.51 7.16,100.51 R10.2 7.01,100.51 6.33,99.82 6.33,91.29 5.64,90.6 J4.P4 4.8,90.6 4.65,90.6 v3.05,89 | 19.2,108.89 19.66,109.35 R_BOOT.2 | 19.2,108.89 v19.43,108.66 | U1.7 40.92,57.76 40.92,58.9 U1.8 40.77,58.98 39.4,58.98 38.79,59.59 35.2,59.59 34.37,58.75 34.37,57.76 33.15,56.54 U1.3 33.07,56.39 33.07,56.23 32.31,55.47 32.31,50.75 | 18.44,43.66 19.13,44.35 R1.2 | 18.44,43.66 18.44,42.52 18.59,42.37 28.19,42.37 32.42,46.59 | 32.42,46.59 33.07,47.24 33.07,50.52 32.84,50.75 32.31,50.75 | 32.31,50.75 31.62,50.75 30.94,50.06 30.94,49.91 R5.2 | v12.34,44.19 9.14,47.39 9.14,47.78 U2.2 | 18.44,43.66 v17.91,44.19 | 32.42,46.59 44.88,34.14 R8.2 R7.2 R6.2 v50.29,34.06 | v88.01,57.15 88.01,58.67 88.09,58.75 U3.2 | 3V3.TP 35.05,7.16 36.35,5.87 40.54,5.87 59.36,24.69 71.17,24.69 R9.2 71.32,24.76 73,24.76 R_CL1.2 73.08,24.92 73.61,25.45 v73.61,25.68 | IC1.2 47.5,102.95 47.73,102.95 48.69,103.91 v48.69,105.38 | D7.2 87.89,63 v87.71,62.82
  Bottom 0.3: v53.49,108.36 50.52,105.38 v48.69,105.38 48.62,105.46 48.62,105.69 46.48,107.82 20.27,107.82 v19.43,108.66 | v17.91,44.19 v12.34,44.19 9.45,47.09 9.45,64.39 3.05,70.79 v3.05,89 | 87.94,51.66 87.94,57.07 v88.01,57.15 87.71,57.45 v87.71,62.82 | 87.94,51.66 73.61,37.34 73.61,34.06 | v73.61,25.68 73.61,34.06 | 73.61,34.06 v50.29,34.06 | v120.24,43.89 95.78,43.89 88.01,51.66 87.94,51.66
32KHZ
  Top 0.152: R2-PINH1.1 91.97,49.38 91.97,49.53 89.46,52.04 89.46,58.75 U3.1 89.53,58.75 89.53,63.85 87.4,65.99 34.44,65.99 18.06,49.61 18.06,47.85 U2.9
DN  (via drill 0.35)
  Top 0.152: 163.26,53.3 163.14,53.42 163.14,53.87 163.37,54.1 163.98,54.1 J2.A7 | 163.26,53.3 163.37,53.19 163.98,53.19 J2.B7 | v153.39,49.53 152.25,49.53 D1.4 | v162.92,53.26 163.22,53.26 163.26,53.3
  Bottom 0.152: v153.39,49.53 159.18,49.53 v162.92,53.26
DP
  Top 0.152: 164.71,53.76 164.9,53.95 164.9,54.33 164.59,54.63 164.06,54.63 J2.B6 | 164.71,53.76 164.67,53.72 164.06,53.72 J2.A6 | 164.71,53.76 166.57,51.89 166.57,48.31 163.98,45.72 152.02,45.72 151.87,45.87 151.87,46.94 151.64,47.17 151.64,48.31 151.79,48.46 153.24,48.46 154,49.22 154,49.99 152.63,51.36 152.25,51.36 D1.6
EPD_3V3  (via drill 0.35)
  Top 0.3: J1.16 81.38,15.24 81.76,15.24 J1.15 81.84,15.31 81.84,16.3 81.92,16.38 | 81.92,16.38 86.33,20.8 EPD_C5.2 | v64.54,16.53 64.47,16.46 62.71,16.46 EPD_3V3.TP | v81.76,16.53 81.92,16.38 | C7.1 78.94,23.39 80.17,26.78 L1.2 82.59,25.14 85.27,25.14 | 85.27,25.14 87.25,25.14 89,26.9 115.29,26.9 130,41.6 130,47.32 Q2.2 | v85.27,25.07 85.27,25.14
  Bottom 0.3: v64.54,16.53 v81.76,16.53 81.84,16.61 81.84,19.51 85.27,22.93 v85.27,25.07
EPD_3V3_C  (via drill 0.35)
  Top 0.3: 72.01,22.93 70.71,21.64 59.44,21.64 45.03,7.24 EPD_3V3_C.TP | 72.01,22.93 72.54,23.47 73,23.47 R_CL1.1 | v124.51,43.74 128.09,47.32 Q2.1 | 72.01,22.93 v72.24,22.71 | v20.57,62.79 20.57,65.23 U2.18
  Bottom 0.3: v124.51,43.74 121.61,43.74 116.51,38.63 87.55,38.63 72.24,23.32 | v72.24,22.71 72.24,23.32 | v20.57,62.79 56.92,26.44 69.11,26.44 72.24,23.32
EPD_BUSY  (via drill 0.35)
  Top 0.152: v84.89,17.83 84.89,15.24 J1.9 | v94.79,37.95 94.79,47.24 95.86,48.31 95.86,61.95 72.58,85.23 | 72.58,85.23 72.54,85.27 72.54,103.63 EPD_BUSY.TP | v11.05,66.6 10.44,65.99 10.44,65.3 U2.26 | 72.58,85.23 v53.95,66.6
  Bottom 0.152: v84.89,17.83 84.89,18.29 94.11,27.51 94.49,27.51 94.79,27.81 v94.79,37.95 | v53.95,66.6 v11.05,66.6
EPD_CS  (via drill 0.35)
  Top 0.152: v70.64,22.55 71.25,23.16 71.25,23.39 R9.1 | v74.75,21.72 74.75,21.56 75.59,20.73 D6.2 | v83.67,14.25 83.36,14.55 83.36,15.16 J1.12 | 58.79,10.71 55.32,7.24 55.02,7.24 EPD_CS.TP | 58.79,10.71 63.93,15.85 v65.15,15.85 65.3,16 v65.3,17.22 | v24.38,43.66 20.57,47.47 20.57,47.78 U2.11 | v58.75,10.74 58.79,10.71
  Bottom 0.152: v74.75,21.72 72.31,21.72 71.48,22.55 v70.64,22.55 v65.3,17.22 | v83.67,14.25 83.06,14.86 71.25,14.86 69.27,12.88 68.12,12.88 v65.15,15.85 | v24.38,43.66 25.83,43.66 v58.75,10.74
EPD_DC  (via drill 0.35)
  Top 0.152: J1.11 83.82,15.62 v83.29,16.15 | v68.96,13.49 68.35,12.88 67.36,12.88 66.29,11.81 66.29,11.05 60.73,5.48 20.42,5.48 11.96,13.94 EPD_DC.TP 11.96,14.02 12.95,15.01 12.95,47.78 U2.5
  Bottom 0.152: v83.29,16.15 82.75,16.15 81.76,15.16 70.64,15.16 v68.96,13.49
EPD_RST  (via drill 0.35)
  Top 0.152: v84.28,16.15 84.28,15.24 J1.10 | v85.95,11.96 85.5,11.96 84.66,11.12 70.03,11.12 v67.21,8.3 | v51.13,8.3 50.06,7.24 EPD_RST.TP | v19.51,60.58 16.76,63.32 16.76,65.23 U2.21 | v25.45,43.05 v25.45,48
  Bottom 0.152: v84.28,16.15 84.28,13.64 v85.95,11.96 | v67.21,8.3 v51.13,8.3 25.45,33.98 v25.45,43.05 | v19.51,60.58 19.51,53.95 v25.45,48
FLASH_CS
  Top 0.152: D9.2 32.23,49.91 30.94,48.61 R5.1 30.94,48.69 28.16,51.47 | 28.16,51.47 28.12,51.51 28.12,58.29 28.73,58.9 33.07,58.9 U1.1 | U2.12 21.87,47.85 21.87,48.16 25.15,51.43 28.12,51.43 28.16,51.47
GDR
  Top 0.152: 76.54,23.58 75.36,24.76 Q3.1 | 76.54,23.58 77.5,22.63 88.47,22.63 90.37,20.73 90.37,18.9 88.39,16.91 88.39,15.24 J1.2 | 76.54,23.58 75.97,23.01 75.13,23.01 73.08,20.95 69.72,20.95 69.34,20.57 69.34,17.37 70.03,16.69 70.03,15.85 R4.2
GND  (via drill 0.35)  (4 unrouted)
  Top 0.152: C5.2 67.44,109.35 66.75,109.35 65.91,108.51 65.76,108.51 RESET_BUTTON.2 65.68,108.51 62.26,108.51 RESET_BUTTON.1 62.18,108.43 62.03,108.43 60.81,107.21 52.12,107.21 52.08,107.17 | 52.08,107.17 50.83,108.43 CHANGE_BUTTON.2 50.67,108.43 v48.54,108.43 47.32,108.43 CHANGE_BUTTON.1 | 52.08,107.17 52.12,107.14 52.12,103.73 C_DELAY.2 | 44.81,109.35 C10.2 | 44.81,109.35 C6.2 | 44.81,109.35 44.81,108.51 | 44.81,108.51 v44.5,108.51 | D10.1 49.3,36.12 47.85,36.12 D11.1 47.78,36.19 46.63,36.19 | 46.63,36.19 44.81,36.19 D12.1 44.73,36.19 43.43,36.19 33.76,45.87 v33.76,48.08 33.76,55.17 | 33.76,55.17 35.13,55.17 36.96,57 U1.9 | 33.76,55.17 33.15,55.17 U1.4 | v32.23,47.39 32.23,48.39 D9.1 | BOOT_BUTTON.2 25.68,108.51 v24.46,108.51 22.25,108.51 BOOT_BUTTON.1 22.17,108.43 22.17,108.2 13.6,99.63 | 13.6,99.63 14.71,98.53 14.71,92.05 J4.G2 15.54,91.13 14.71,90.3 14.71,87.32 15.54,86.49 15.54,85.57 J4.G1 6.93,76.88 | 13.6,99.63 13.56,99.67 12.5,99.67 11.73,98.91 11.58,98.91 D8.1 | U2.29_1 12.34,53.8 13.49,53.8 U2.29_4 | U2.29_2 12.34,55.09 12.34,56.23 U2.29_3 | U2.29_5 13.49,55.09 12.42,55.09 U2.29_2 | U2.29_3 12.42,56.23 13.49,56.23 U2.29_6 13.56,56.31 14.78,56.31 U2.29_9 14.86,56.23 14.86,55.09 U2.29_8 14.86,55.02 14.86,53.8 U2.29_7 14.78,53.72 14.48,53.42 v14.48,52.8 | U2.29_1 12.34,53.87 12.34,55.02 U2.29_2 | U2.1 7.85,47.85 7.85,49.3 12.27,53.72 U2.29_1 | U2.29_3 12.27,56.31 7.85,60.73 7.85,65.23 U2.28 7.77,65.3 7.77,76.05 6.93,76.88 | C9.2 9.45,100.58 8.23,100.58 7.62,101.19 6.63,101.19 2.36,96.92 2.36,95.71 J4.G4 2.36,95.63 2.36,95.25 4.34,93.27 4.42,93.27 4.88,92.81 J4.P6 4.8,92.81 1.37,89.38 1.37,82.52 J4.G3 1.37,82.45 6.93,76.88
  Top 0.152: C2.2 156.97,4.57 158.12,4.57 C1.2 158.19,4.65 158.19,7.54 158.23,7.58 | 158.23,7.58 158.34,7.47 158.95,7.47 159.41,7.92 159.41,8.23 SENSOR2.5 | 158.23,7.58 157.89,7.92 157.89,8.23 SENSOR2.7 157.81,8.3 157.81,8.61 157.12,9.29 157.12,11.12 SENSOR2.1 157.12,11.2 157.12,12.42 162.38,17.68 165.35,17.68 J3.1 165.43,17.75 165.81,17.75 167.79,19.73 167.79,48.08 168.48,48.77 J2.MP1 168.55,48.84 168.55,58.98 J2.MP2 168.48,59.05 164.67,59.05 J2.MP4 164.59,59.05 144.93,59.05 | U4.9 132.06,54.41 132.06,54.25 131.52,53.72 131.14,53.72 U4.4 131.06,53.72 130.07,53.72 128.85,54.94 128.02,54.94 | U4.1 131.14,55.17 131.52,55.17 132.06,54.63 132.06,54.48 U4.9 | U4.9 132.06,54.18 133.04,54.18 U4.6 133.12,54.18 144.93,54.18 | 128.02,54.94 127.1,54.94 C1_BAT.2 | C4_USB.2 152.4,46.48 152.4,47.62 152.32,47.7 C5_USB.2 152.4,47.7 152.93,47.7 154.27,49.03 | 154.27,49.03 154.31,49.07 154.31,51.51 153.92,51.89 R2-USB1.1 153.85,51.97 151.49,51.97 150.57,51.05 150.57,50.98 150.11,50.52 149.73,50.52 D1.2 149.66,50.44 149.12,50.44 148.13,49.45 146.61,49.45 146.46,49.61 146.46,50.52 147.14,51.2 147.14,51.36 R2-USB.2 147.14,51.43 144.93,53.64 144.93,54.18 | 144.93,54.18 144.93,59.05 | 144.93,59.05 144.93,61.03 GND44.TP | 154.27,49.03 154.46,48.84 164.59,48.84 J2.MP3 | C10_SUPERCAP.2 94.56,49.22 91.67,46.33 87.78,46.33 87.1,47.01 86.94,47.01 C8.1 86.94,46.94 v86.03,46.94 | v85.11,47.85 85.57,48.31 85.57,49.38 U3.13 | C1_BAT2.2 127.86,42.14 124.74,42.14 C3.- 124.66,42.21 123.06,42.21 120.78,44.5 119.25,44.5 | 117.88,41.76 118.57,41.76 IC4.2 | 117.88,41.76 116.43,41.76 115.67,40.99 114.3,40.99 R1_PWRUSB.1 114.22,40.92 112.51,39.2
  Top 0.152: 119.22,43.24 119.18,43.28 118.03,43.28 117.88,43.13 117.88,41.76 | 119.22,43.24 119.63,42.82 119.63,40.77 117.65,38.78 117.5,38.78 C1_BAT1.2 | 119.29,46.75 119.25,46.71 119.25,44.5 | 119.29,46.75 120.78,48.23 120.78,48.39 C2_BAT.2 120.85,48.46 122.91,48.46 124.51,50.06 124.51,50.75 124.47,50.79 | 119.25,44.5 119.25,43.28 119.22,43.24 | R2_BAT.1 113.23,52.12 113.39,52.12 118.72,46.78 119.25,46.78 119.29,46.75 | 112.51,39.2 107.67,34.36 93.65,34.36 88.77,29.49 86.64,29.49 D3.1 86.56,29.41 85.65,29.41 84.89,28.65 v83.06,28.65 | 124.47,50.79 123.9,51.36 123.67,51.36 MCP73831.2 | 112.51,39.2 v112.39,39.32 | 80.58,14.51 80.77,14.7 80.77,15.16 J1.17 | 80.58,14.51 78.79,12.72 76.35,12.72 J1.MP2 76.28,12.72 74.45,12.72 71.4,15.77 R4.1 71.32,15.85 71.32,17.68 | EPD_C1.1 89,19.58 87.71,19.58 EPD_C2.1 87.63,19.58 86.41,19.58 EPD_C5.1 86.33,19.51 86.33,18.36 85.34,17.37 85.34,15.24 J1.8 85.27,15.16 85.27,14.7 84.2,13.64 81.46,13.64 80.58,14.51 | 64.73,12.91 63.93,12.11 63.93,11.96 SJ1.1 | 64.73,12.91 64.77,12.95 65.15,12.95 66.06,13.87 66.22,13.87 R2.1 | EPD_C6.1 82.68,19.58 81.53,19.58 EPD_C7.1 81.46,19.58 80.31,19.58 EPD_C8.1 80.24,19.58 79.1,19.58 EPD_C9.1 79.02,19.58 77.72,19.58 EPD_C10.1 77.65,19.51 77.42,19.51 v76.81,18.9 | 71.32,17.68 71.78,17.68 EPD_C11.1 | 71.32,17.68 70.79,17.68 EPD_C12.1 70.79,17.75 70.03,18.52 70.03,19.43 71.25,20.65 74.07,20.65 D6.1 74.14,20.65 v75.13,19.66 | 64.73,12.91 64.39,13.26 64.39,14.48 64.5,14.59 | 64.5,14.59 65.15,15.24 66.6,15.24 67.36,16 67.36,16.53 68.05,17.22 v68.73,17.22 | 80.73,23.81 80.31,23.39 C7.2
  Top 0.152: 80.73,23.81 80.77,23.85 86.56,23.85 89.23,26.52 90.75,26.52 90.91,26.36 90.91,18.97 89.84,17.91 89.84,12.72 J1.MP1 89.92,12.72 91.06,12.72 96.55,7.24 114.99,7.24 GND.TP | 80.73,23.81 v80.16,24.38 | v128.02,54.79 128.02,54.94 | v124.82,50.98 124.66,50.98 124.47,50.79 | v46.63,34.75 46.63,36.19 | v64.08,14.63 64.47,14.63 64.5,14.59 | IC1.3 46.73,102.07 46.6,102.07 44.81,103.87 44.81,108.51
  Bottom 0.152: v48.54,108.43 44.58,108.43 v44.5,108.51 v24.46,108.51 | v33.76,48.08 33.07,47.39 v32.23,47.39 19.89,47.39 v14.48,52.8 | v85.11,47.85 v86.03,46.94 91.29,46.94 98.91,39.32 v112.39,39.32 | v68.73,17.22 72.77,17.22 75.13,19.58 v75.13,19.66 75.89,18.9 v76.81,18.9 76.81,21.03 v80.16,24.38 83.06,27.28 v83.06,28.65 | v128.02,54.79 128.02,54.18 v124.82,50.98 | v46.63,34.75 46.63,33.75 55.09,25.3 55.09,23.62 v64.08,14.63
I2C_PW  (via drill 0.35)
  Top 0.152: SENSOR2.2 157.89,11.12 157.89,9.29 158.65,8.53 158.65,8.3 SENSOR2.6 158.65,8.61 159.11,9.07 159.72,9.07 160.02,8.76 160.02,4.65 | 160.02,4.65 160.55,4.65 R2-PINH.2 | 160.02,4.65 159.41,4.65 R1-PINH.2 159.33,4.57 158.12,3.35 C1.1 158.12,3.27 156.97,3.27 C2.1 156.9,3.35 156.21,4.04 156.21,5.03 157.05,5.87 157.05,8.23 SENSOR2.8 156.97,8.23 v154.08,11.12 | v21.79,60.58 21.79,65.23 U2.17
  Bottom 0.152: v21.79,60.58 22.17,60.58 63.93,18.82 63.93,16.15 68.96,11.12 v154.08,11.12
INT_RTC
  Top 0.152: 85.46,46.59 85.42,46.63 85.42,47.24 86.26,48.08 86.26,58.22 86.79,58.75 U3.3 | 85.46,46.59 86.03,46.02 93.12,46.02 95.56,48.46 95.56,52.27 92.51,55.32 92.51,58.83 R1-PINH1.1 | 29.98,17.18 39.93,7.24 INT_RTC.TP | 29.98,17.18 16.76,30.4 16.76,47.78 U2.8 | 29.98,17.18 43.66,30.86 49.76,30.86 65.46,46.56 85.42,46.56 85.46,46.59
IO/BOOT  (2 unrouted)
  Top 0.152: R_BOOT.1 20.57,108.05 20.57,108.28 21.26,108.97 21.26,109.04 21.49,109.27 26.52,109.27 26.75,109.04 26.75,108.74 27.43,108.05 C6.1 27.43,107.97 24.38,104.93 24.38,65.3 U2.15
IO/CHANGE  (2 unrouted)
  Top 0.152: R_CHANGE.1 52.43,108.05 51.82,108.66 51.82,108.97 51.51,109.27 46.48,109.27 46.25,109.04 46.25,108.97 45.57,108.28 45.57,108.05 C10.1 45.57,107.97 45.87,107.67 47.32,107.67 49.3,105.69 49.3,103.97 49.27,103.95 49.27,87.14 22.1,59.97 19.2,59.97 14.25,64.92 14.25,65.23 U2.23
MISO  (via drill 0.35)
  Top 0.152: v43.74,33.98 44.96,32.77 R8.1 | D12.2 44.73,37.64 43.89,36.8 v43.74,36.8 43.66,36.8 40.16,40.31 40.16,56.69 40.39,56.92 41.15,56.92 41.6,57.38 41.6,59.28 41.57,59.32 | 33.15,57.99 33.15,57.76 U1.2 | 33.15,57.99 33.98,58.83 33.98,58.98 34.98,59.97 40.92,59.97 41.57,59.32 | v10.74,63.4 9.14,65 9.14,65.23 U2.27 9.14,65.3 9.14,68.88 16.46,76.2 v16.46,89.76 | 33.15,57.99 v28.73,57.99 | v3.81,94.72 4.57,93.95 5.11,93.95 J4.P7 | v131.06,64.77 145.01,64.77 MISO.TP | 41.57,59.32 v47.02,64.77
  Bottom 0.152: v43.74,36.8 v43.74,33.98 | v10.74,63.4 23.32,63.4 v28.73,57.99 | v3.81,94.72 11.51,94.72 v16.46,89.76 | v47.02,64.77 v131.06,64.77
MOSI  (via drill 0.35)
  Top 0.152: 44.31,41.11 47.78,37.64 D11.2 | 44.31,41.11 40.92,44.5 40.92,55.09 U1.5 | v81.76,14.25 82.3,14.78 82.3,15.16 J1.14 | v70.48,12.04 69.19,10.74 v67.06,10.74 | v47.85,31.62 47.85,32.69 R7.1 | v16.15,46.48 15.47,47.17 15.47,47.78 U2.7 15.47,47.85 15.47,48.08 17.6,50.21 v17.6,50.59 | v4.27,88.62 5.11,89.46 J4.P3 | v81.53,103.63 87.48,103.63 MOSI.TP | v42.29,39.09 44.31,41.11
  Bottom 0.152: v81.76,14.25 72.69,14.25 v70.48,12.04 | v67.06,10.74 47.85,29.95 v47.85,31.62 45.19,31.62 40.01,36.8 | v16.15,46.48 30.33,46.48 40.01,36.8 | v17.6,50.59 17.6,55.62 10.13,63.09 10.13,64.77 4.27,70.64 v4.27,88.62 16.23,88.62 31.24,103.63 v81.53,103.63 | 40.01,36.8 v42.29,39.09
N$1
  Top 0.152: R2-USB1.2 153.92,53.19 162.08,53.19 162.61,52.65 163.98,52.65 J2.A5
N$2
  Top 0.152: R2-USB.1 147.22,50.14 147.22,50.29 148.44,51.51 148.44,52.58 151.49,55.62 163.98,55.62 J2.B5
N$3
  Top 0.152: Q1.1 66.14,16 67.51,17.37 67.59,17.37 69.04,18.82 69.04,20.73 69.57,21.26 72.01,21.26 74.22,23.47 74.22,25.37 78.26,29.41 85.19,29.41 90.45,34.67 106.76,34.67 113.77,41.68 115.44,41.68 116.28,42.52 D2.2
N$4
  Top 0.152: R1.1 19.2,43.2 19.89,43.89 19.89,46.86 19.28,47.47 19.28,47.78 U2.10
N$5  (via drill 0.35)
  Top 0.152: v69.11,15.85 69.04,15.92 68.05,15.92 Q1.2 | v94.18,28.12 105.54,28.12 116.13,38.71 C1_BAT1.1 116.2,38.78 116.28,38.86 116.28,40.38 D2.1 116.36,40.46 116.66,40.77 118.57,40.77 IC4.3 118.64,40.84 118.8,40.84 119.33,41.38 119.33,42.21 118.87,42.67 118.64,42.67 IC4.1
  Bottom 0.152: v69.11,15.85 81.99,15.85 94.18,28.04 v94.18,28.12
N$6
  Top 0.152: C4.1 90.46,29.82 D3.2 90.14,29.41 86.64,25.91 D4.1
N$9
  Top 0.152: R1_BAT.2 118.34,50.44 119.79,50.44 120.32,49.91 123.14,49.91 123.6,50.37 MCP73831.1
N$10
  Top 0.152: R2_BAT.2 114.53,52.12 114.53,51.74 116.51,49.76 117.5,49.76 117.65,49.91 117.65,50.98 117.81,51.13 120.32,51.13 121.01,50.44 MCP73831.5
N$11
  Top 0.152: IC1.5 50.96,103.55 C_DELAY.1
N$12
  Top 0.152: J1.24 77.27,15.24 75.36,15.24 72.31,18.29 71.25,18.29 70.79,18.74 70.79,18.9 EPD_C12.2
N$13
  Top 0.152: R2-PINH1.2 91.97,50.67 91.97,58.22 91.75,58.44 91.75,59.44 92.43,60.12 R1-PINH1.2
N$14
  Top 0.152: CHG_LED.C 117.12,52.2 117.12,50.59 117.04,50.52 R1_BAT.1
N$15
  Top 0.152: J1.22 78.26,15.24 78.26,16.53 76.2,18.59 76.2,19.35 77.65,20.8 EPD_C10.2
N$16
  Top 0.152: D7.1 86.56,63.3 86.56,61.75 R_CAPACITOR.1
N$17  (via drill 0.35)
  Top 0.152: v79.32,18.67 79.32,15.24 J1.20 | v79.55,21.79 79.55,21.56 80.24,20.88 EPD_C8.2
  Bottom 0.152: v79.32,18.67 79.32,21.56 v79.55,21.79
N$18
  Top 0.152: J1.19 79.86,15.24 79.86,15.62 83.13,18.9 83.21,18.9 83.44,19.12 83.44,19.96 83.13,20.27 82.07,20.27 81.53,20.8 EPD_C7.2
N$19  (via drill 0.35)
  Top 0.152: v78.79,13.64 79.17,13.64 80.31,14.78 80.31,15.16 J1.18 | v80.85,13.33 84.81,13.33 v85.72,14.25 | v89.76,22.25 89.31,22.25 v88.32,23.24 | v86.87,21.79 83.67,21.79 82.75,20.88 EPD_C6.2
  Bottom 0.152: v78.79,13.64 80.54,13.64 v80.85,13.33 | v85.72,14.25 85.72,18.21 v89.76,22.25 | v86.87,21.79 v88.32,23.24
N$20
  Top 0.152: -2.7,114.3 174.4,114.3 174.4,-1.9 -2.7,-1.9 -2.7,114.3 | -2.8,114.3 -2.7,114.3
N$21
  Bottom 0.152: -5.3,116.7 176,116.7 176,-3.7 -5.3,-3.7 -5.3,116.7
N$24
  Top 0.152: J1.4 87.33,15.24 87.33,16.3 90.07,19.05 90.07,20.19 89.38,20.88 89.08,20.88 EPD_C1.2
N$26
  Top 0.152: J1.5 86.87,15.24 86.87,16.3 89.76,19.2 89.76,20.04 89.46,20.34 88.16,20.34 87.71,20.8 EPD_C2.2
PREVGH  (via drill 0.35)
  Top 0.152: v78.64,18.06 78.79,17.91 78.79,15.24 J1.21 | v78.64,21.79 78.64,21.26 79.02,20.88 EPD_C9.2 | v83.67,30.02 83.67,38.12 83.08,38.71 79.44,38.71 D5.1
  Bottom 0.152: v78.64,18.06 v78.64,21.79 83.67,26.82 v83.67,30.02
PREVGL  (via drill 0.35)
  Top 0.152: 76.39,17.03 74.52,18.9 71.86,18.9 EPD_C11.2 | 76.39,17.03 77.8,15.62 77.8,15.24 J1.23 | v84.58,23.24 86.41,23.24 89,25.83 90.07,25.83 D4.2 | 76.39,17.03 v76.58,17.22
  Bottom 0.152: v84.58,23.24 84.58,23.01 78.79,17.22 v76.58,17.22
RESE  (via drill 0.35)
  Top 0.152: 70.64,12.65 68.58,12.65 68.28,12.34 67.97,12.34 R3.2 | 70.64,12.65 70.79,12.65 71.4,12.04 85.11,12.04 87.78,14.7 87.78,15.16 J1.3 | v75.59,25.68 75.06,25.68 74.52,25.14 74.52,24.54 75.29,23.77 75.29,23.54 Q3.2 | v69.95,20.27 69.95,19.81 69.72,19.58 69.72,17.45 70.64,16.53 70.64,12.65
  Bottom 0.152: v75.59,25.68 75.59,21.64 74.22,20.27 v69.95,20.27
RESE'
  Top 0.152: 67.02,13.52 65.46,11.96 SJ1.2 | 67.02,13.52 67.06,13.56 67.89,13.56 R3.1 | R2.2 65,13.94 65.15,13.94 65.84,14.63 66.75,14.63 66.98,14.4 66.98,13.56 67.02,13.52
RESET  (via drill 0.35)  (2 unrouted)
  Top 0.152: v47.78,105.54 47.78,103.96 IC1.1 | v59.51,107.82 60.27,107.82 60.43,107.97 R_RESET.1 | C5.1 67.44,107.97 66.83,107.97 66.52,107.67 v63.48,107.67 63.48,100.89 18.36,55.78 v16.54,55.78 | v10.44,49.68 10.44,47.85 U2.3
  Bottom 0.152: v47.78,105.54 47.78,105.38 48.39,104.77 56.46,104.77 v59.51,107.82 59.44,107.67 v63.48,107.67 | v16.54,55.78 v10.44,49.68
RTC_RST  (via drill 0.35)
  Top 0.152: v24.61,63.47 23.09,65 23.09,65.23 U2.16 | v81.23,63.47 85.57,59.13 85.57,58.83 U3.4
  Bottom 0.152: v81.23,63.47 v24.61,63.47
RX
  Top 0.152: U2.24 12.95,65.3 12.95,65.83 16.69,69.57 RX.TP
SCK  (via drill 0.35)
  Top 0.152: U1.6 40.92,56.39 40.92,56.16 49.3,47.78 49.3,37.64 D10.2 49.38,37.56 49.38,37.41 50.9,35.89 50.9,33.75 49.49,32.34 | v82.75,14.25 82.75,15.16 J1.13 | v69.27,11.73 68.5,11.73 68.12,11.35 v67.82,11.35 | 49.49,32.34 49.15,32.69 R6.1 | 49.49,32.34 v49.91,31.93 | v15.24,46.48 14.25,47.47 14.25,47.78 U2.6 14.25,47.85 14.25,48.16 71.09,105 73,105 74.3,103.71 79.93,103.71 SCK.TP | v3.66,90.75 4.57,91.67 5.11,91.67 J4.P5
  Bottom 0.152: v82.75,14.25 79.93,11.43 69.57,11.43 v69.27,11.73 | v67.82,11.35 67.82,11.81 55.4,24.23 55.4,26.44 v49.91,31.93 49.91,32.38 42.6,39.7 39.01,39.7 31.62,47.09 15.85,47.09 v15.24,46.48 15.24,46.56 12.65,46.56 9.83,49.38 9.83,64.62 3.66,70.79 v3.66,90.75
SCL  (via drill 0.35)
  Top 0.152: R2-PINH.1 160.63,3.35 160.93,3.35 161.62,4.04 161.62,8.99 159.49,11.12 SENSOR2.4 159.41,11.2 v159.41,13.79 | v130.61,56.23 132.89,56.23 133.73,55.4 133.73,54.94 133.5,54.71 133.12,54.71 U4.7 | v88.85,51.81 88.85,49.99 89.38,49.45 U3.16 | v18.97,64.01 18.06,64.92 18.06,65.23 U2.20
  Bottom 0.152: v88.85,51.81 93.23,56.2 | 93.23,56.2 93.27,56.23 v130.61,56.23 132.59,56.23 159.41,29.41 v159.41,13.79 | v18.97,64.01 23.16,64.01 24.92,62.25 86.28,62.25 87.45,63.43 87.96,63.43 93.19,58.19 93.19,56.23 93.23,56.2
SDA  (via drill 0.35)
  Top 0.152: R1-PINH.1 159.41,3.35 160.1,4.04 161.16,4.04 161.31,4.19 161.31,8.23 158.72,10.82 158.72,11.12 SENSOR2.3 158.57,11.2 158.57,11.58 v157.89,12.27 | v132.28,55.62 132.36,55.62 132.74,55.24 133.04,55.24 U4.8 | v90.22,48.46 90.07,48.46 89.76,48.16 89.08,48.16 88.16,49.07 88.16,49.38 U3.15 88.16,49.45 88.16,52.04 88.7,52.58 88.7,59.66 89.23,60.2 89.23,63.61 88.39,64.46 88.02,64.46 v87.1,65.38 | v20.88,67.21 19.28,65.61 19.28,65.3 U2.19
  Bottom 0.152: v132.28,55.62 132.28,55.02 123.71,46.44 | 123.71,46.44 120.55,43.28 95.4,43.28 v90.22,48.46 | v20.88,67.21 85.27,67.21 v87.1,65.38 | 123.71,46.44 v157.89,12.27
SRC  (via drill 0.35)
  Top 0.152: C4.2 91.24,31.04 v90.91,30.71 | D5.2 82.84,32.9 v82.83,32.92 82.3,33.45 82.28,33.44 L1.1 | v78.26,24.99 77.5,24.23 Q3.3
  Bottom 0.152: v90.91,30.71 85.04,30.71 84.24,31.51 | v82.83,32.92 84.24,31.51 | v78.26,24.99 78.26,25.53 84.24,31.51
SS_SD  (via drill 0.35)
  Top 0.152: D8.2 12.95,98.83 12.27,98.14 9.37,98.14 8.31,99.21 7.16,99.21 R10.1 7.16,99.14 7.16,90.07 5.56,88.47 J4.P2 5.56,88.39 v6.48,87.48 | v12.72,64.01 15.47,61.26 15.47,52.88 11.66,49.07 11.66,47.85 U2.4
  Bottom 0.152: v12.72,64.01 6.48,70.25 v6.48,87.48
TX
  Top 0.152: U2.25 11.66,65.3 11.66,69.34 11.58,69.42 TX.TP
USB_D+  (via drill 0.35)
  Top 0.152: v149.05,52.27 149.66,51.66 149.66,51.43 D1.1 | v25.45,56.08 v32.23,62.86 | v25.45,48.92 24.38,47.85 U2.14
  Bottom 0.152: v149.05,52.27 137.01,52.27 125.55,63.73 87.33,63.73 86.46,62.86 v32.23,62.86 | v25.45,48.92 v25.45,56.08
USB_D-  (via drill 0.35)
  Top 0.152: v43.97,30.25 49.61,30.25 63.52,44.17 82.89,44.17 90.79,36.27 94.03,36.27 112.09,54.33 127.56,54.33 132.74,49.15 148.28,49.15 148.59,49.45 149.66,49.45 D1.3 | v24.69,45.87 23.09,47.47 23.09,47.78 U2.13
  Bottom 0.152: v43.97,30.25 40.31,30.25 v24.69,45.87
VBAT  (via drill 0.35)
  Top 0.3: U4.3 131.14,54.18 131.14,54.63 U4.2 130.99,54.71 130.61,54.71 130.07,55.24 | 130.07,55.24 129.92,55.4 129.92,63.78 VBAT.TP | v67.13,20.95 67.13,18.13 Q1.3 | v120.02,46.33 120.78,47.09 C2_BAT.1 120.93,47.17 122.22,47.17 125.5,50.44 125.5,51.28 124.51,52.27 123.67,52.27 MCP73831.3 | v129.77,54.94 130.07,55.24 | v68.81,25.75 68.81,31.65 77.53,40.38 77.53,40.39 84.89,40.39 84.89,40.33 89.34,35.89 96.54,35.89 v105.23,44.58
  Bottom 0.3: v67.13,20.95 67.13,24.08 v68.81,25.75 | v105.23,44.58 118.26,44.58 v120.02,46.33 120.09,46.4 121.23,46.4 v129.77,54.94
VBUS
  Top 0.3: 151.03,48.77 151.03,47.85 C5_USB.1 151.03,47.7 151.03,46.56 151.1,46.48 C4_USB.1 151.18,46.33 151.18,44.96 152.48,43.66 PFMF.050.1.2 | 151.03,48.77 151.03,49.68 151.79,50.44 152.17,50.44 D1.5 | R1_PWRUSB.2 114.22,42.37 109.65,42.37 106.38,45.64 VBUS.TP 106.45,45.8 106.45,46.63 112.78,52.96 117.73,52.96 118.42,52.27 118.57,52.27 CHG_LED.A 118.72,52.27 121.01,52.27 MCP73831.4 121.16,52.35 122.45,53.64 127.03,53.64 C1_BAT.1 127.1,53.57 131.9,48.77 151.03,48.77
VRTC
  Top 0.3: R_CAPACITOR.2 88.16,61.11 88.16,60.5 87.48,59.82 87.48,57.61 86.87,57 86.87,49.45 U3.14 86.87,49.3 86.87,49 88.16,47.7 | 88.16,47.7 88.16,47.09 C8.2 | C10_SUPERCAP.1 94.56,51.43 94.56,51.05 92.81,49.3 92.81,48.84 91.75,47.78 88.24,47.78 88.16,47.7
VUSB  (4 unrouted)